# EAGLE board BOOSTDCDC_BATT (1) (EAGLE 9.5.2)
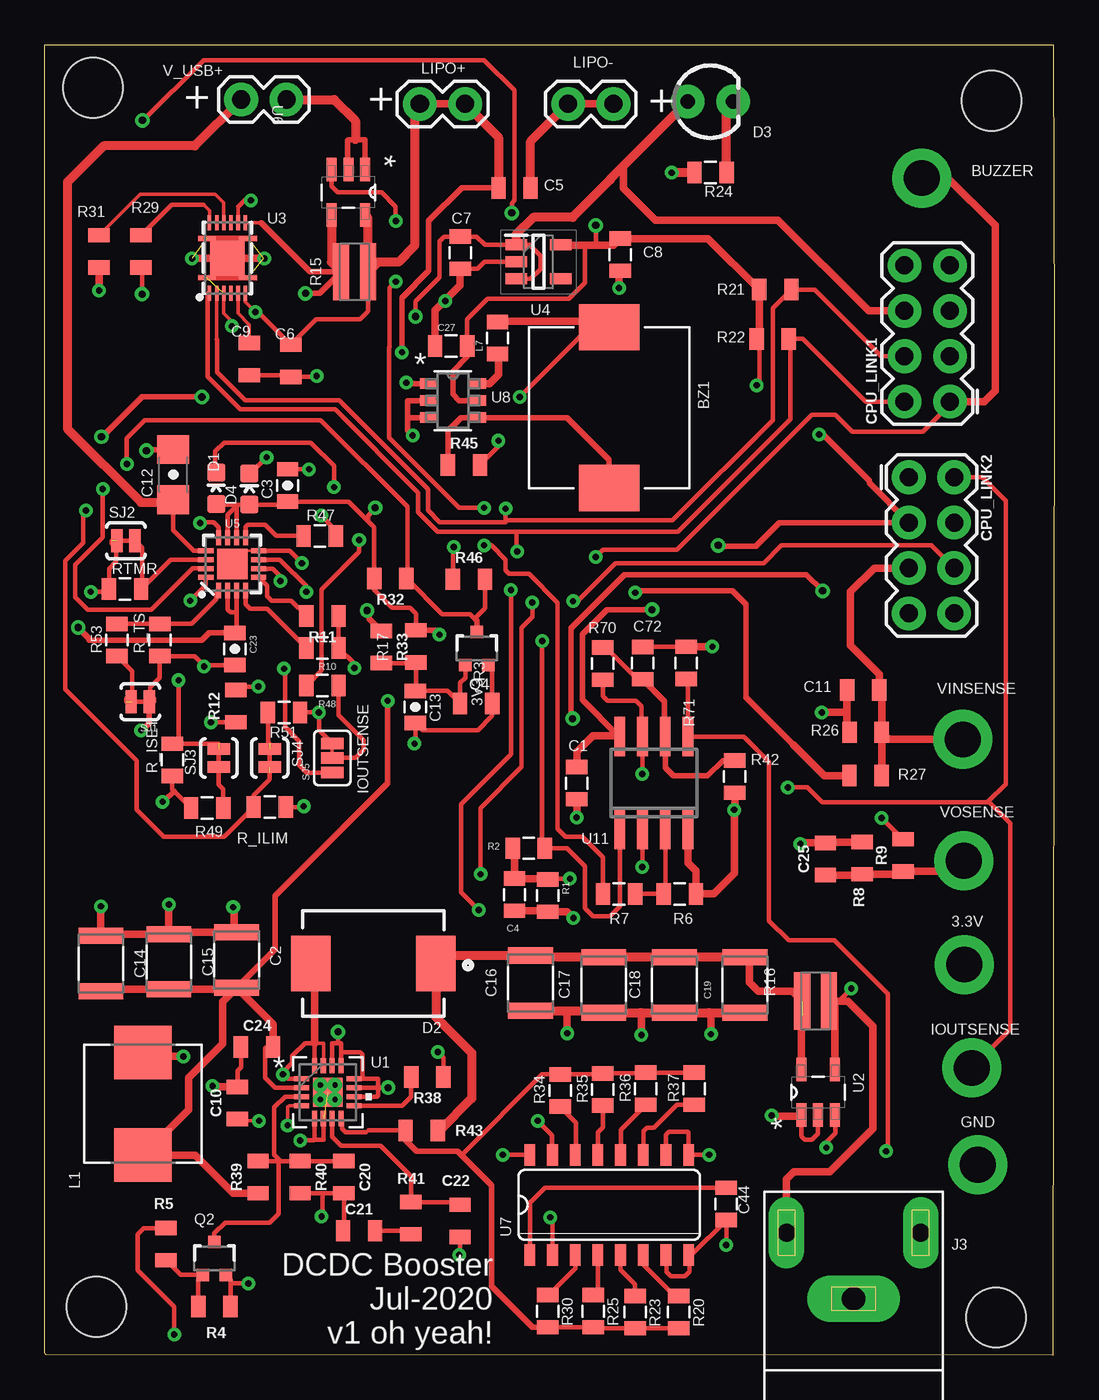
[diagram p0: board, top side]
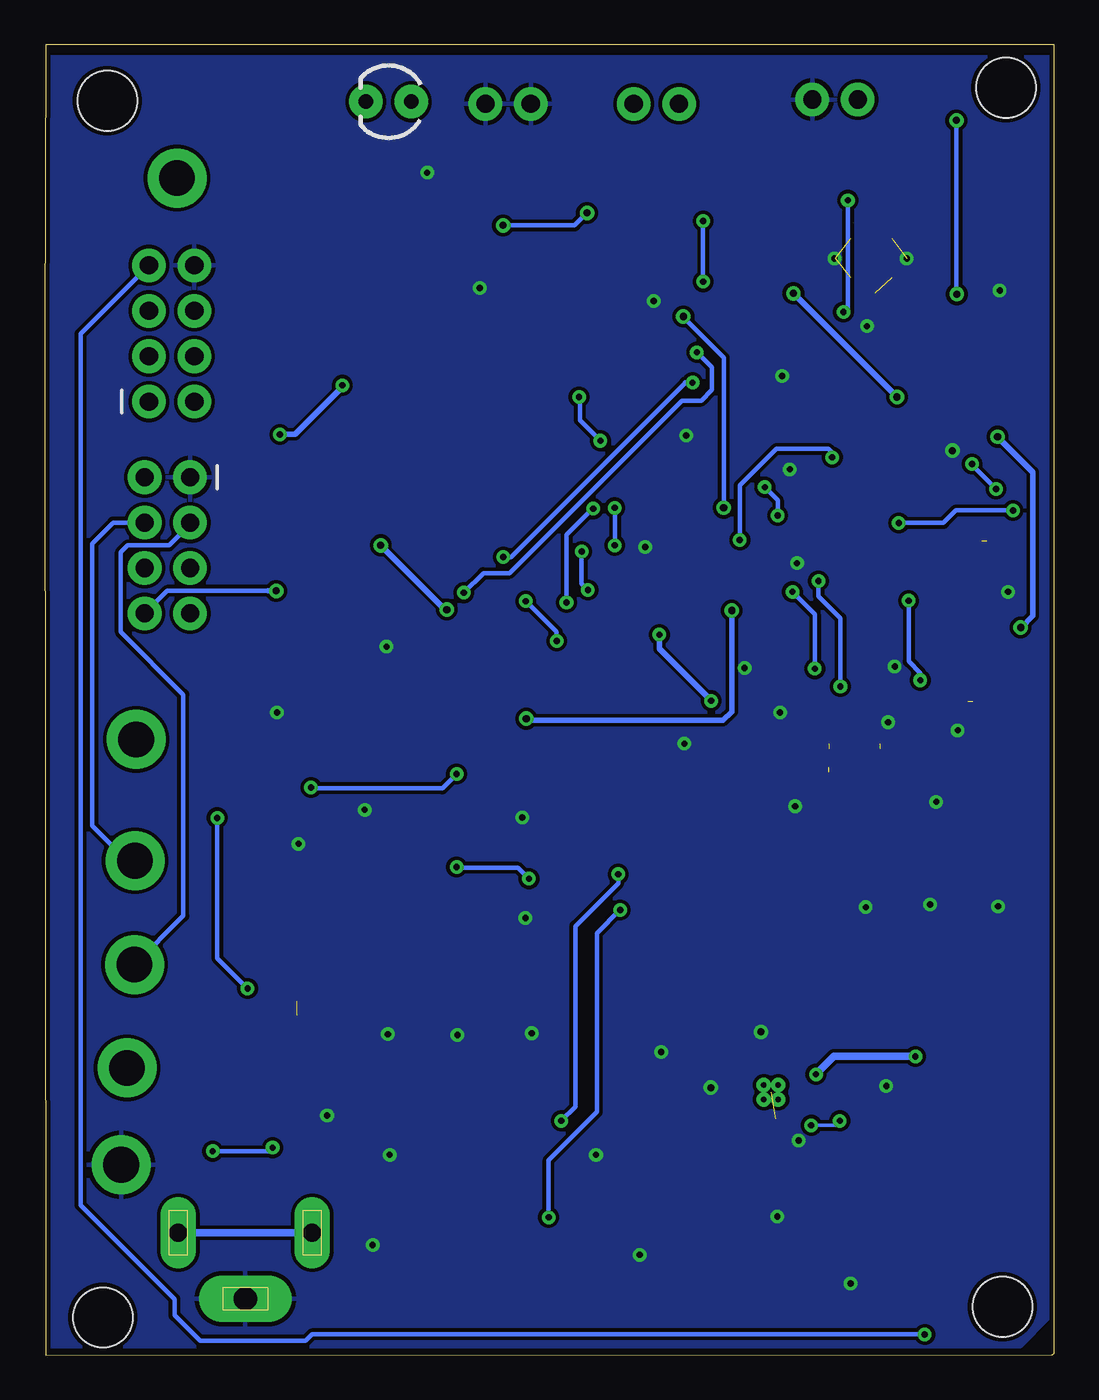
[diagram p1: board, bottom side, seen from below]

Size 56.51 x 73.33 mm. Coordinates in mm from the lower left corner, seen from the top.
Outline: 0,73.32 56.45,73.33 56.51,57.02 56.44,0 0.1,0.02 0,0.12 0,73.32
Copper layers (1*16): Top 0.035mm / dielectric 1.5mm / Bottom 0.035mm
Design rules "default *": minimum track width 6mil, minimum drill 0.3mm, track to track 8mil, track to pad 8mil, pad to pad 8mil, via to via 8mil, smd to smd 8mil, copper to edge 10mil, drill to drill 6mil, minimum pad ring 10mil, minimum via ring 8mil, stop-mask expansion 4mil, vias tented up to drill 0mil, thermal gap 10mil
Net classes: 2 gnd: width 0.305 mm, drill 0.483 mm, clearance 0.203 mm
Holes 3.35 mm at 2.7,70.92 2.9,2.72 53,70.19 53.25,2.12

## Footprints (pad centres in the part's own frame; a part is rotated, then mirrored left to right if it is on the bottom)
1X01_2MM = drill 2 pad 3.302: 1 0,0
PKMCS0909 = smd 2.6 x 3.4: 1 -4.5,0; 2 4.5,0
0805 = smd 0.8 x 1.2: 1 -0.9,0; 2 0.9,0
WCAP-CSGP_1210 = smd 0.9 x 2.5: 1 -1.55,0; 2 1.55,0
0805-CAP = smd 0.8 x 1.2: 1 -0.9,0; 2 0.9,0
0805@1 = smd 0.8 x 1.2: 1 -0.9,0; 2 0.9,0
1206-CAP = smd 1.6 x 1.8: 1 -1.4,0; 2 1.4,0
2X4 = drill 1.016 pad 1.88: 1 -3.81,-1.27; 2 -3.81,1.27; 3 -1.27,-1.27; 4 -1.27,1.27; 5 1.27,-1.27; 6 1.27,1.27; 7 3.81,-1.27; 8 3.81,1.27
LED-0603 = smd 1 x 1: A 0,-0.877; C 0,0.877
DIOM7959X250N = smd 2.2 x 3.1: A 3.5,0; C -3.5,0
LED_3MM = drill 0.813 pad 1.88: A -1.27,0; K 1.27,0
PJRAN1X1U01X = drill 1.3 pad 2.6 long: 1 0,0 | drill 1 pad 2 long: 2 3.75,3.7; 3 -3.75,3.7
INDM7366X500 = smd 3 x 3.2: 1 -2.87,0; 2 2.87,0
1X02 = drill 1.016 pad 1.88: 1 0,0; 2 2.54,0
SOT323 = smd 0.7 x 0.7: 1 -0.65,-0.925; 2 0.65,-0.925; 3 0,0.925
WRIS-KWKH_0612 = smd 3.2 x 0.9: 1 0,0.75; 2 0,-0.75
PAD-JUMPER-2-NC_BY_TRACE_YES_SILK = smd 0.635 x 1.27: 1 -0.508,0; 2 0.508,0
PAD-JUMPER-3-2OF3_NC_BY_TRACE_YES_SILK_FULL_BOX = smd 0.635 x 1.27: 1 -0.813,0; 2 0,0; 3 0.813,0
RTE16_1P66X1P66_TEX = smd 0.85 x 0.28: 1 -1.475,0.75; 2 -1.475,0.25; 3 -1.475,-0.25; 4 -1.475,-0.75; 9 1.475,-0.75; 10 1.475,-0.25; 11 1.475,0.25; 12 1.475,0.75 | smd 0.28 x 0.85: 5 -0.75,-1.475; 6 -0.25,-1.475; 7 0.25,-1.475; 8 0.75,-1.475; 13 0.75,1.475; 14 0.25,1.475; 15 -0.25,1.475; 16 -0.75,1.475 | smd 1.66 x 1.6: 17 0,0 | drill 0.305 pad 0.508: V -0.406,-0.406; V_1 -0.406,0.406; V_2 0.406,-0.406; V_3 0.406,0.406
SOT95P280X145-5N = smd 1.321 x 0.559: 1 -1.27,0.94; 2 -1.27,0; 3 -1.27,-0.94; 4 1.27,-0.94; 5 1.27,0.94
PDSO-N12 = smd 0.2 x 0.85: 1 -1,-1.975; 2 -0.6,-1.975; 3 -0.2,-1.975; 4 0.2,-1.975; 5 0.6,-1.975; 6 1,-1.975; 7 1,1.975; 8 0.6,1.975; 9 0.2,1.975; 10 -0.2,1.975; 11 -0.6,1.975; 12 -1,1.975 | smd 1.95 x 1.95: EP 0,0 | smd 1 x 0.25: EP1 -1.15,1.1; EP2 -1.15,-1.1; EP3 1.15,-1.1; EP4 1.15,1.1
SOT95P282X145-5N = smd 1.2 x 0.6: 1 -1.25,0.95; 2 -1.25,0; 3 -1.25,-0.95; 4 1.25,-0.95; 5 1.25,0.95
PVQFN-N16 = smd 0.28 x 0.85: 1 -0.75,-1.475; 2 -0.25,-1.475; 3 0.25,-1.475; 4 0.75,-1.475; 9 0.75,1.475; 10 0.25,1.475; 11 -0.25,1.475; 12 -0.75,1.475 | smd 0.85 x 0.28: 5 1.475,-0.75; 6 1.475,-0.25; 7 1.475,0.25; 8 1.475,0.75; 13 -1.475,0.75; 14 -1.475,0.25; 15 -1.475,-0.25; 16 -1.475,-0.75 | smd 1.7 x 1.7: EP 0,0
SO16 = smd 0.6 x 1.2: 1 -4.445,-2.8; 2 -3.175,-2.8; 3 -1.905,-2.8; 4 -0.635,-2.8; 5 0.635,-2.8; 6 1.905,-2.8; 7 3.175,-2.8; 8 4.445,-2.8; 9 4.445,2.8; 10 3.175,2.8; 11 1.905,2.8; 12 0.635,2.8; 13 -0.635,2.8; 14 -1.905,2.8; 15 -3.175,2.8; 16 -4.445,2.8
DBV6 = smd 0.972 x 0.568: 1 -1.362,0.95; 2 -1.362,0; 3 -1.362,-0.95; 4 1.362,-0.95; 5 1.362,0; 6 1.362,0.95
SO08 = smd 0.6 x 2.2: 1 -1.905,-2.6; 2 -0.635,-2.6; 3 0.635,-2.6; 4 1.905,-2.6; 5 1.905,2.6; 6 0.635,2.6; 7 -0.635,2.6; 8 -1.905,2.6

## Placement (x,y rotation side)
3V3  M01PTH_2MM  [1X01_2MM]  51.48,21.86 0 top
BUZZER  M01PTH_2MM  [1X01_2MM]  49.1,65.87 0 top
BZ1  PKMCS0909E4000-R1  [PKMCS0909]  31.6,53.02 270 top
C1  100n  [0805]  29.79,32.01 270 top
C2  47uF 16V  [WCAP-CSGP_1210]  10.75,22.12 270 top
C3  10uF  [0805-CAP]  13.6,48.67 90 top
C4  N.C.  [0805]  26.3,25.77 90 top
C5  100n  [0805@1]  26.3,65.32 0 top
C6  1uF / 16V  [0805@1]  13.77,55.64 270 top
C7  4.7uF  [0805]  23.26,61.69 270 top
C8  4.7uF  [0805]  32.21,61.58 270 top
C9  470n  [0805@1]  11.46,55.74 270 top
C10  47n 35V  [0805@1]  10.8,14.12 90 top
C11  100n  [0805@1]  45.81,37.23 180 top
C12  1.0uF  [1206-CAP]  7.2,49.27 90 top
C13  10uF  [0805-CAP]  20.75,36.27 270 top
C14  47uF 16V  [WCAP-CSGP_1210]  3.15,21.92 270 top
C15  47uF 16V  [WCAP-CSGP_1210]  6.95,22.02 270 top
C16  47uF 25V  [WCAP-CSGP_1210]  27.2,20.82 90 top
C17  47uF 25V  [WCAP-CSGP_1210]  31.3,20.72 90 top
C18  47uF 25V  [WCAP-CSGP_1210]  35.25,20.72 90 top
C19  47uF 25V  [WCAP-CSGP_1210]  39.2,20.72 90 top
C20  47n 35V  [0805@1]  16.75,9.97 270 top
C21  100n 50V  [0805@1]  17.6,6.97 0 top
C22  270p 50V  [0805@1]  23.25,7.52 90 top
C23  10uF  [0805-CAP]  10.65,39.52 270 top
C24  100n 50V  [0805@1]  11.89,17.24 0 top
C25  100n  [0805@1]  43.7,27.77 90 top
C27  100n  [0805]  22.75,56.47 0 top
C44  100n  [0805]  38.15,8.47 90 top
C72  N.C.  [0805]  33.47,38.73 270 top
CPU_LINK1  [2X4]  49.4,57.17 90 top
CPU_LINK2  [2X4]  49.64,45.32 270 top
D1  BLUE  [LED-0603]  9.6,48.52 0 top
D2  B520C-13-F  [DIOM7959X250N]  18.4,21.92 180 top
D3  [LED_3MM]  37.26,70.14 0 top
D4  RED  [LED-0603]  11.45,48.47 0 top
GND  M01PTH_2MM  [1X01_2MM]  52.23,10.66 0 top
IOUTSENSE  M01PTH_2MM  [1X01_2MM]  51.9,16.08 0 top
J3  PJRAN1X1U01X  [PJRAN1X1U01X]  45.28,3.16 0 top
L1  2.2uH - 74437346022  [INDM7366X500]  5.5,14.07 90 top
L7  MMZ2012Y202BT000  [0805]  25.35,56.92 90 top
LIPO+  LiPoIN  [1X02]  21,70.02 0 top
LIPO-  LiPoIN  [1X02]  29.3,70.02 0 top
Q2  2N7002PW  [SOT323]  9.5,5.42 0 top
Q4  2N7002PW  [SOT323]  24.19,39.55 0 top
R1  10k  [0805]  28.15,25.72 270 top
R2  10k  [0805]  27.1,28.37 0 top
R3  1M  [0805]  24.15,36.47 180 top
R4  470k  [0805]  9.5,2.72 180 top
R5  33R  [0805]  6.8,6.22 90 top
R6  82k  [0805]  35.55,25.82 0 top
R7  330k  [0805]  32.15,25.82 0 top
R8  39k  [0805]  45.75,27.82 270 top
R9  150k  [0805]  48.05,27.97 90 top
R10  180  [0805]  15.55,39.57 180 top
R11  1M  [0805]  15.55,41.37 180 top
R12  1M  [0805]  10.7,36.32 90 top
R15  0.01R  [WRIS-KWKH_0612]  17.35,60.62 90 top
R16  0.01R  [WRIS-KWKH_0612]  43.15,19.82 270 top
R17  330R  [0805]  20.78,39.67 90 top
R20  11K  [0805]  35.5,2.42 270 top
R21  4k7  [0805]  40.9,59.62 0 top
R22  4k7  [0805]  40.75,56.87 0 top
R23  5K6  [0805]  33.05,2.42 270 top
R24  200R  [0805]  37.27,66.17 0 top
R25  2K8  [0805]  30.7,2.47 270 top
R26  75k  [0805]  45.95,34.86 0 top
R27  39k  [0805]  45.94,32.43 180 top
R29  10k  [0805]  5.4,61.77 270 top
R30  1K4  [0805]  28.15,2.47 270 top
R31  10k  [0805]  3.05,61.77 90 top
R32  470k  [0805]  19.35,43.47 180 top
R33  33R  [0805]  18.84,39.63 270 top
R34  180K  [0805]  28.85,14.82 90 top
R35  91K  [0805]  31.25,14.87 90 top
R36  43K  [0805]  33.65,14.92 90 top
R37  22K  [0805]  36.35,14.92 90 top
R38  78.7k  [0805]  21.42,15.58 180 top
R39  78.7k  [0805]  11.95,9.97 90 top
R40  78.7k  [0805]  14.3,9.97 270 top
R41  1.87k  [0805]  20.5,7.67 270 top
R42  3k3  [0805]  38.63,32.38 90 top
R43  78.7k  [0805]  21.1,12.59 180 top
R45  330R  [0805]  23.47,49.82 0 top
R46  10k  [0805]  23.75,43.42 0 top
R47  180  [0805]  15.4,45.85 0 top
R48  1k  [0805]  15.55,37.47 180 top
R49  590  [0805]  9.1,30.62 0 top
R51  1.1k  [0805]  13.4,35.97 180 top
R53  10k  [0805]  4.05,40.02 90 top
R70  10k  [0805]  31.24,38.7 270 top
R71  100k  [0805]  35.91,38.74 270 top
R_ILIM  [0805]  12.6,30.67 180 top
R_ISET  [0805]  7.15,33.32 90 top
R_TS  [0805]  6.45,40.02 90 top
RTMR  [0805]  4.5,42.87 0 top
SJ1  [PAD-JUMPER-2-NC_BY_TRACE_YES_SILK]  5.35,36.57 180 top
SJ2  [PAD-JUMPER-2-NC_BY_TRACE_YES_SILK]  4.55,45.57 0 top
SJ3  [PAD-JUMPER-2-NC_BY_TRACE_YES_SILK]  9.75,33.42 90 top
SJ4  [PAD-JUMPER-2-NC_BY_TRACE_YES_SILK]  12.6,33.42 270 top
SJ5  [PAD-JUMPER-3-2OF3_NC_BY_TRACE_YES_SILK_FULL_BOX]  16.1,33.42 90 top
U1  TPS55330RTET  [RTE16_1P66X1P66_TEX]  15.85,14.72 0 top
U2  MAX9938TEUK+T (G=25)  [SOT95P280X145-5N]  43.29,14.72 90 top
U3  BQ27441-G1  [PDSO-N12]  10.23,61.39 0 top
U4  AP2205-W5-33Y  [SOT95P282X145-5N]  27.64,61.18 0 top
U5  BQ24075  [PVQFN-N16]  10.5,44.27 0 top
U6  MAX9938TEUK+T (G=25)  [SOT95P280X145-5N]  17,65.07 270 top
U7  TPIC2810D  [SO16]  31.6,8.42 0 top
U8  SN74LVC1G19DBVR  [DBV6]  22.85,53.42 0 top
U11  MCP6L02SN  [SO08]  34.1,32.02 0 top
V_USB+  [1X02]  11,70.26 0 top
VINSENSE  M01PTH_2MM  [1X01_2MM]  51.39,34.46 0 top
VOSENSE  M01PTH_2MM  [1X01_2MM]  51.45,27.67 0 top

## Library data of the parts
3V3 BUZZER CPU_LINK1 CPU_LINK2 GND IOUTSENSE VINSENSE VOSENSE = SparkFun-Connectors
BZ1 = buzzer
C1 R1 R2 R6 R7 SJ1-SJ5 = SparkFun-Passives
C2 C14-C19 = Wurth_Elektronik_Passive_Capacitors_rev19a; WE-NUMBER: 885012109003/47uF
C3 C13 C23 = SparkFun-Capacitors; PROD_ID: CAP-11330
C4 C27 C44 C72 L7 LIPO+ LIPO- R10 R20 R23-R25 R30 R34-R37 R42 R47-R49 R51 R53 R70 R71 R_ILIM R_ISET R_TS RTMR V_USB+ = SparkFun
C5 C6 C9-C11 C20-C22 C24 C25 = SparkFun-Capacitors; PROD_ID: CAP-14259
C7 C8 = BeagleBone_Blue_R3
C12 = SparkFun-Capacitors; PROD_ID: CAP-09822
D1 = SparkFun-LED; PROD_ID: DIO-08575
D2 = B520C-13-F; AVAILABILITY: Unavailable; DESCRIPTION: Diode Schottky 20V 5A Surface Mount SMC; DIGIKEY-PURCHASE-URL: https://snapeda.com/shop?store=DigiKey&id=325969; MF: Diodes Inc.; MP: B520C-13-F; PACKAGE: DO-214 Diodes Inc.; PRICE: None
D3 = SparkFun-LED; PROD_ID: DIO-08794
D4 = SparkFun-LED; PROD_ID: DIO-00819
J3 = Connectors; CREATED_BY: PCBLayout.com; DIGIKEY_PART_NUMBER: PJRAN1X1U01X-ND; MANUFACTURER: Switchcraft Inc.; MPN: PJRAN1X1U01X
L1 = Inductance_2.2uH; DESCRIPTION: 10µH Shielded Molded Inductor 3.2A 69mOhm Max Nonstandard; DIGIKEY-PURCHASE-URL: https://snapeda.com/shop?store=DigiKey&id=586788; MF: Wurth Electronics; MP: 74437349100; PACKAGE: Nonstandard Wurth Electronics
Q2 Q4 = SparkFun-DiscreteSemi; PROD_ID: TRANS-11151
R3-R5 R8 R9 R11 R12 R17 R21 R22 R26 R27 R29 R31-R33 R38-R41 R43 R45 R46 = SparkFun-Resistors
R15 R16 = Wurth_Resistor_WRIS-KWKH; DATASHEET-URL: https://katalog.we-online.de/pbs/datasheet/561070332051.pdf; IR: 3.2A; MOUNT: SMT; PART-NUMBER: 561070332051; PRATED: 1W; TCR: 350ppm/ °C; TECHNICAL-REFERENCE: KH0612R100F101QAATP0000
U1 = TPS55330; BUILT_BY: EMA_UL_Team; MANUFACTURER_PART_NUMBER: TPS55330RTET; SOURCELIBRARY: TI_2015-1-5; VENDOR: Texas Instruments
U2 U6 = MAX9938; DESCRIPTION: Precision Current-Sense Amplifier; MPN: MAX9938FEUK+T; OC_FARNELL: -; OC_NEWARK: 01N6733; PACKAGE: SOT-23-5; SUPPLIER: Maxim
U3 = battery-management-temp; PROD_ID: IC-13220
U4 = AP2205-W5-7; DESCRIPTION: LDO Voltage Regulators LDO CMOS LowCurr; HEIGHT: 1.45mm; MANUFACTURER_NAME: Diodes Inc.; MANUFACTURER_PART_NUMBER: AP2205-W5-7; MOUSER_PART_NUMBER: 621-AP2205-W5-7; MOUSER_PRICE-STOCK: https://www.mouser.com/Search/Refine.aspx?Keyword=621-AP2205-W5-7
U5 = battery-management-temp; PROD_ID: IC-13219
U7 = EDCPSU - Rev2
U8 = SN74LVC1G19DBVR; DATASHEET_URL: http://www.ti.com/lit/gpn/SN74LVC1G19; DESCRIPTION: 1-of-2 Decoder/Demultiplexer; FAMILY_NAME: LL Decoder, Mux/Demux; GENERIC_PART_NUMBER: SN74LVC1G19; INDUSTRY_STD_PKG_TYPE: SOT-23; MANUFACTURER: Texas Instruments; MANUFACTURER_PART_NUMBER: SN74LVC1G19DBVR; PACKAGE_DESIGNATOR: DBV; PIN_COUNT: 6; VENDOR: Texas Instruments
U11 = EDCPSU_Rev4

## Nets
1.8V: C9.1 U3.5
3.3V: 3V3.1 C1.1 C8.1 C27.2 CPU_LINK2.3 R21.1 R22.1 R29.2 U4.5 U8.5 U11.8
!CE!: R10.2 U5.4
!CHG!: R47.1 U5.9
!PGOOD!: SJ5.1 U5.7
#EN_DCDC: CPU_LINK1.7 R5.2
#SHIPPINGMOD: CPU_LINK2.8 R33.1
BATTERY_IN: C5.1 C6.1 LIPO+.1 LIPO+.2 R15.2 R27.2 U3.6 U3.8 U6.5
BUZZER: BUZZER.1 CPU_LINK1.1 U8.1
EN1: R12.2 U5.6
EN2: R11.2 U5.5
GND: C1.2 C2.1 C3.2 C4.1 C5.2 C6.2 C7.2 C8.2 C9.2 C10.2 C11.2 C12.2 C13.2 C14.1 C15.1 C16.1 C17.1 C18.1 C19.1 C20.2 C21.1 C22.1 C23.2 C24.1 C25.2 C27.1 C44.1 C72.1 CPU_LINK1.8 CPU_LINK2.1 GND.1 J3.1 LIPO-.1 LIPO-.2 Q2.2 Q4.2 R1.2 R3.1 R4.1 R6.2 R8.1 R10.1 R11.1 R12.1 R24.1 R26.1 R31.1 R38.1 R40.2 R42.1 R46.1 R49.1 R51.1 R71.1 R_ILIM.1 R_ISET.1 R_TS.1 RTMR.1 SJ1.1 SJ2.1 SJ5.3 U1.5 U1.6 U1.10 U1.11 U1.12 U1.13 U1.14 U1.17 U2.1 U2.2 U3.3 U3.EP U3.EP1 U3.EP2 U3.EP3 U3.EP4 U4.2 U5.8 U5.EP U6.1 U6.2 U7.7 U7.8 U7.9 U7.10 U7.16 U8.2 U8.3 U11.4 V_USB+.2
GPOUT: R29.1 U3.12
IBATTSENSE: CPU_LINK2.6 R2.2 U11.1
ILIM: R_ILIM.2 SJ4.2 U5.12
IOUTSENSE: CPU_LINK2.2 IOUTSENSE.1 R70.2 U11.7
ISET: R_ISET.2 SJ3.2 U5.16
N$1: D4.C R48.2
N$2: CPU_LINK2.7
N$3: CPU_LINK1.3
N$4: Q2.1 R4.2 R5.1
N$5: CPU_LINK1.5
N$6: D1.C R47.2
N$7: R53.1 SJ1.2
N$8: R71.2 U2.3 U11.5
N$9: R51.2 SJ4.1
N$10: C4.2 R1.1 R2.1 U11.2
N$11: R6.1 R7.2 U11.3
N$13: J3.2 J3.3 R9.2 R16.1 U2.4
N$14: R49.2 SJ3.1
N$15: R48.1 SJ5.2
N$16: R20.1 U7.6
N$17: L7.1 U8.6
N$18: D3.K R24.2
N$19: BZ1.1 L7.2 R45.2
N$21: R23.1 U7.5
N$22: BZ1.2 R45.1 U8.4
N$23: C13.1 Q4.1 R3.2 R17.1 R33.2
N$24: R25.1 U7.4
N$30: R30.1 U7.3
N$31: R34.1 U7.14
N$32: R35.1 U7.13
N$33: R36.1 U7.12
N$34: R37.1 U7.11
N$35: C10.1 U1.4
N$36: D2.A L1.2 U1.1 U1.15 U1.16
N$37: R38.2 U1.9
N$42: C20.1 Q2.3 R39.2 R40.1 U1.3
N$43: C21.2 R41.2
N$44: C22.2 R41.1 U1.7
N$45: R20.2 R23.2 R25.2 R30.2 R34.2 R35.2 R36.2 R37.2 R43.2 U1.8
N$46: R7.1 U6.3
N$77: C72.2 R42.2 R70.1 U11.6
SCL: CPU_LINK1.4 R21.2 U3.2 U7.15
SDA: CPU_LINK1.2 R22.2 U3.1 U7.2
SYSOFF: Q4.3 R32.1 R46.2 U5.15
TMR: RTMR.2 SJ2.2 U5.14
TS: R31.2 U3.10
TS1: R53.2 R_TS.2 U5.1
V_USB: C12.1 U5.13 V_USB+.1
VBATT: C23.1 R15.1 U3.7 U5.2 U5.3 U6.4
VCC-ISO: C44.2 U7.1
VINSENSE: C11.1 CPU_LINK2.5 R26.2 R27.1 VINSENSE.1
VOSENSE: C25.1 CPU_LINK2.4 R8.2 R9.1 VOSENSE.1
VSOURCE: C16.2 C17.2 C18.2 C19.2 D2.C R16.2 R43.1 U2.5
VSYS: C2.2 C3.1 C7.1 C14.2 C15.2 C24.2 CPU_LINK1.6 D1.A D3.A D4.A L1.1 R17.2 R32.2 R39.1 U1.2 U4.1 U4.3 U5.10 U5.11

## Tracks (layer width: path | path; a pad name or v marks a point on that pad's centre or on a via)
1.8V
  Top 0.2: U3.5 10.83,58.29 11.45,57.67
  Top 0.203: C9.1 11.45,57.67
3.3V  (via drill 0.35, 0.4)
  Top 0.254: v39.85,54.27 40,54.42 40,57.02 | 46.15,48.92 46.15,48.81 | 43.55,51.52 v43.35,51.52 | C27.2 23.65,57.97 24.8,59.12 29.35,59.12 30.25,60.02 30.25,62.12 | 32.1,34.67 32.15,34.67 | 30.9,62.12 30.85,62.17 v30.85,63.22 | v26.15,63.92 26.15,64.47 26.3,64.62 26.3,70.77 24.6,72.47 8.9,72.47 5.5,69.07 v5.48,69.09 | v5.45,59.37 5.45,60.82 R29.2
  Top 0.305: 46.15,48.81 CPU_LINK2.3 41.12,46.59 39.8,45.27 37.7,45.27 v37.7,45.32 | 46.15,48.92 43.55,51.52 | C27.2 23.65,55.87 22.85,55.07 22.85,53.77 23.2,53.42 U8.5 | v34,41.72 31.48,41.72 30.1,40.34 30.1,36.67 32.1,34.67
  Top 0.406: U4.5 30.25,62.12 30.9,62.12 31.85,62.12 C8.1 37.14,62.48 R21.1 40,57.02 R22.1 | C1.1 29.79,33.76 30.7,34.67 32.15,34.67 U11.8
  Bottom 0.254: 3V3.1 48.75,24.59 48.75,36.97 52.25,40.47 52.25,44.92 51.85,45.32 49.55,45.32 48.37,46.5 CPU_LINK2.3 | 39.8,54.22 v39.85,54.27 | v30.85,63.22 26.85,63.22 v26.15,63.92 | v5.48,69.09 5.48,59.4 v5.45,59.37
  Bottom 0.305: v43.35,51.52 42.5,51.52 39.8,54.22 | v37.7,45.32 34.05,41.67 v34,41.72
!CE!
  Top 0.254: R10.2 12.45,41.77 11.5,41.77 11.25,42.02 U5.4
!CHG!
  Top 0.254: R47.1 12.97,45.85 12.35,46.47 11.35,46.47 11.25,46.37 U5.9
!PGOOD!  (via drill 0.35)
  Top 0.254: SJ5.1 14.66,32.61 14.25,33.02 14.25,34.37 13.45,35.17 13.45,38.37 v13.4,38.42 | v14.65,42.72 14.65,43.02 13.15,44.52 U5.7
  Bottom 0.254: v13.4,38.42 13.4,41.47 v14.65,42.72
#EN_DCDC  (via drill 0.35)
  Top 0.254: R5.2 5.55,7.12 5.2,6.77 5.2,4.77 7.25,2.72 v7.25,1.17
  Bottom 0.254: v7.25,1.17 41.55,1.17 41.9,0.82 47.82,0.82 49.24,2.24 49.24,3.14 54.5,8.4 54.5,57.15 CPU_LINK1.7
#SHIPPINGMOD  (via drill 0.4)
  Top 0.305: R33.1 18.15,41.22 18.15,41.67 v18.05,41.67 | v29.55,35.62 29.45,35.72 29.45,40.67 32.45,43.67 42.65,43.67 v43.55,42.77
  Bottom 0.254: CPU_LINK2.8 49.65,42.77 44,42.77
  Bottom 0.305: v18.05,41.67 18.05,36.02 18.55,35.52 29.45,35.52 v29.55,35.62 | v43.55,42.77 44,42.77
BATTERY_IN  (via drill 0.35)
  Top 0.2: U3.8 10.83,64.25 | v11.8,58.37 11.23,58.94 U3.6
  Top 0.254: v11.55,64.62 11.2,64.62 10.83,64.25 | v11.8,58.37 11.94,58.37 C6.1 15.2,57.97 17.65,57.97 18.1,58.42 R15.2
  Top 0.305: 41.9,34.17 39.25,36.82 39.25,42.02 38.5,42.77 33.15,42.77 v33.05,42.67 | v20,56.12 20,59.17 21.5,60.67 21.5,63.47 23.35,65.32 C5.1
  Top 0.406: R27.2 43.64,32.43 41.9,34.17 | LIPO+.1 LIPO+.2
  Top 0.508: LIPO+.2 23.65,69.91 25.4,68.16 C5.1 | LIPO+.1 20.7,69.72 20.7,62.07 19.8,61.17 18.65,61.17 R15.2 18.1,63.64 U6.5
  Bottom 0.254: v11.55,64.62 11.55,58.62 v11.8,58.37 | v33.05,42.67 31.95,43.77 30.5,43.77 20.85,53.42 19.75,53.42 19.15,54.02 19.15,55.27 v20,56.12
  Bottom 0.305: v33.05,42.67 32.9,42.67
BUZZER  (via drill 0.35)
  Top 0.254: CPU_LINK1.1 50.67,53.19 49.15,51.67 45.2,51.67 44.25,52.62 42.95,52.62 35.39,45.06 31.24,45.06 v30.84,44.66
  Top 0.305: v20.25,54.42 20.3,54.37 U8.1
  Top 0.406: BUZZER.1 50.55,65.87 53.2,63.22 53.2,53.97 52.59,53.36 CPU_LINK1.1
  Bottom 0.254: 20.65,54.42 30.41,44.66 v30.84,44.66
  Bottom 0.305: v20.25,54.42 20.65,54.42
EN1  (via drill 0.35)
  Top 0.254: U5.6 12.75,44.02 13.2,43.57 v13.2,43.32 | v11.97,37.42 10.9,37.42 R12.2
  Bottom 0.254: v13.2,43.32 13.2,42.47 11.97,41.24 v11.97,37.42
EN2
  Top 0.254: U5.5 12.45,43.05 12.45,42.47 12.7,42.22 13.8,42.22 R11.2
GND  (via drill 0.35, 0.4)  (6 unrouted)
  Top 0.152: U5.EP 11.25,45.02 U5.8
  Top 0.2: U3.3 10.03,58.29 10.48,57.84
  Top 0.254: 3.76,45.57 3.76,45.4 4,45.16 4,44.42 3.6,44.02 RTMR.1 3.45,42.72 v2.58,42.72 | v14.4,44.32 13.7,45.02 U5.8 | 6.14,36.57 6.14,36.74 5.9,36.98 5.9,37.37 6.45,37.92 R_TS.1 8.4,39.12 8.95,38.57 | 8.95,38.57 v8.92,38.55 | C23.2 9,38.62 8.95,38.57 | R49.1 7.25,31.57 7.15,31.67 R_ISET.1 | R51.1 15.25,35.97 15.3,35.92 v15.35,35.97 15.35,34.98 SJ5.3 | R_ILIM.1 14.5,30.67 v14.5,30.72 | Q4.2 25.05,38.41 R3.1 25.05,35.77 24.25,34.97 21.15,34.97 C13.2 20.75,34.22 v20.7,34.22 | R46.1 22.85,45.22 v22.9,45.22 | C9.2 13.67,54.84 C6.2 15.07,54.74 15.17,54.84 v15.22,54.8 | v17.34,38.45 17.34,38.68 R10.1 R11.1 | C3.2 v14.8,49.57 | U1.12 17.8,15.47 | 17.8,15.47 18.65,15.47 18.65,14.97 | 18.65,14.97 U1.11 | U1.10 18.6,14.47 18.65,14.52 18.65,14.97 | U1.6 15.6,12.07 | 15.6,12.07 | 15.1,12.07 | 15.1,12.07 15.6,12.07 | 15.6,12.07 | U1.14 16.1,17.47 | 16.1,17.47 | U1.13 16.6,16.97 | 16.6,16.97 16.6,17.47 | 16.6,17.47 | 16.6,17.47 16.38,17.47 | 16.38,17.47 16.1,17.47 | 16.1,17.47 | 16.6,16.97 17.65,16.97 17.8,16.82 17.8,15.47 | R40.2 15.55,9.07 | 15.55,9.07 C20.2 16.75,7.02 C21.1 | C22.1 23.25,5.62 v23.2,5.62 | v15.5,7.77 15.55,7.82 15.55,9.07 | C10.2 10.8,15.92 10.99,16.11 C24.1 | R38.1 22.32,16.65 v22,16.97 | U7.7 34.8,5.6 34.8,4.67 35.05,4.42 35.85,4.42 36.1,4.67 36.1,5.57 U7.8 36.2,5.62 C44.1 v38.15,6.17 | U7.16 v25.65,11.22 | v37.2,11.22 U7.9 36.05,12.47 36,12.52 34.95,12.52 34.78,12.35 U7.10 | Q2.2 10.4,4.25 10.4,3.92 | 10.4,3.92 R4.1 | 28.1,24.87 R1.2 | R12.1 v9.3,35.42 | C7.2 24.22,60.79 24.61,61.18 U4.2 | 10.48,57.84 v10.48,57.58 | C72.1 R71.1 | U2.2 43.29,12.41 42.95,12.07 42.55,12.07 42.35,12.27 U2.1 | U1.5 15.1,12.07 | 15.1,12.07 15.05,12.02 v14.31,12.02 v14.3,12.02
  Top 0.254: 10.4,3.92 10.5,4.02 v11.4,4.02 | 16.38,17.47 16.42,17.51 v16.42,18.1 | 18.65,14.97 v19.21,14.97 19.22,14.96 v19.22,14.98
  Top 0.305: 7.25,31.57 6.7,31.02 6.7,30.97 v6.6,30.97 | SJ1.1 5.86,35.38 5.45,34.97 v5.4,34.97 | U6.1 17.94,67.98 17.9,68.02 17.4,68.02 17,68.02 16.95,67.97 16.95,66.39 U6.2 | U8.2 20.35,53.42 20.3,53.37 20.3,52.52 | 20.3,52.52 20.35,52.47 U8.3 | 20.3,52.52 20.3,51.77 v20.6,51.47 | C12.2 5.7,50.67 v5.7,50.62
  Top 0.406: C10.2 9.45,15.02 v9.4,15.07 | C15.1 7.05,23.67 C2.1 10.6,23.82 10.6,25.02 v10.55,25.07 | C15.1 3.25,23.57 C14.1 v3.15,25.12 | C15.1 v6.95,25.22 | 29.25,19.27 v29.25,18.02 | 33.35,19.17 33.4,19.12 v33.4,17.92 | 37.2,19.17 37.3,19.07 v37.3,17.97 | C11.2 44.91,36.12 | 44.91,36.12 44.91,35 R26.1 | 44.91,36.12 44.76,35.97 v43.5,35.97 | R42.1 38.65,31.46 38.65,30.57 v38.6,30.52 38.6,26.97 37.45,25.82 R6.2 36.45,27.12 36.01,27.57 U11.4 | C4.1 28.1,24.87 | R1.2 29.25,24.82 v29.6,24.47 | C1.2 29.79,30.28 29.88,30.2 v29.77,30.09 | R8.1 43.75,28.72 C25.2 42.35,28.67 v42.3,28.62 | C7.2 23.26,59.88 22.4,59.02 | 22.4,59.02 v22.43,58.99 | C8.2 32.21,60.58 32.15,60.52 v32.15,59.72 | 22.4,59.02 21.85,58.47 C27.1 | R31.1 v3.05,59.57 | U3.EP 8.38,61.39 8.35,61.42 8.3,61.42 v8.25,61.37 | U3.EP 12.23,61.39 12.25,61.37 | U3.EP 12.28,61.39 v12.3,61.37 | R71.1 37.33,39.64 37.35,39.62 v37.38,39.65 | U2.1 42.27,13.37 40.7,13.37 v40.7,13.42 | LIPO-.1 LIPO-.2
  Top 0.508: C16.1 29.25,19.27 31.2,19.27 C17.1 33.35,19.17 C18.1 37.2,19.17 C19.1 | C5.2 27.2,67.92 LIPO-.1 | R24.1 v35.1,66.17 | V_USB+.2 16.21,70.26 17.4,69.07 17.4,68.02
  Bottom 0.254: v14.5,30.72 14.4,30.72
  pour Bottom: 0.3,72.72 0.3,2.12 1.9,0.52 57.2,0.52 57.2,72.62 0.4,72.62
GPOUT
  Top 0.2: U3.12 9.23,64.04 8.9,64.37
  Top 0.254: R29.1 7.1,64.37 8.9,64.37
IBATTSENSE  (via drill 0.35)
  Top 0.254: U11.1 32.2,25.12 31.65,24.57 30.7,24.57 30.25,25.02 30.25,27.37 29.25,28.37 R2.2 28,28.72 27.85,28.87 v27.85,39.97 | CPU_LINK2.6 49.64,45.32 41.25,45.32 40.25,44.32 31.95,44.32 29.82,42.2 v29.57,42.2
  Bottom 0.254: v29.57,42.2 27.85,40.47 v27.85,39.97
ILIM  (via drill 0.35)  (1 unrouted)
  Top 0.254: U5.12 9.75,46.32 9.45,46.62 8.7,46.62 v8.7,46.57 | v2.31,47.27 2.15,47.11 2.15,45.47 1.14,44.46 1.14,37.28 5.15,33.27 5.15,30.52 6.65,29.02 10.05,29.02 R_ILIM.2 11.7,31.33 12.6,32.23 12.6,32.63
  Bottom 0.254: v8.7,46.57 6.2,46.57 5.5,47.27 v2.31,47.27 v2.3,47.27
IOUTSENSE  (via drill 0.35)
  Top 0.254: U11.7 33.4,34.69 33.4,36.32 33.1,36.62 31.5,36.62 31.24,36.88 R70.2 | U11.7 33.5,34.59 | U11.7 33.47,32.54 v33.45,32.52 | v41.6,31.77 42.7,31.77 43.53,30.94 52.88,30.94 | 52.88,30.94 52.83,30.99 53.8,31.96 53.8,47.82 52.49,49.13 CPU_LINK2.2 | 52.88,30.94 54.05,29.77 54.05,18.23 IOUTSENSE.1
  Bottom 0.254: v33.45,32.52 34.25,31.72 41.55,31.72 v41.6,31.77
ISET  (via drill 0.35)  (1 unrouted)
  Top 0.254: 9.75,34.21 9.47,34.21 9.46,34.22 R_ISET.2 7.5,34.57 v7.5,37.77 | U5.16 9.02,43.09 v8.15,42.22
  Bottom 0.254: v8.15,42.22 8.15,38.82 7.5,38.17 v7.5,37.77
N$1  (via drill 0.35)
  Top 0.254: R48.2 15.5,38.32 15.5,42.87 17.6,44.97 v17.6,45.62 | v12.42,50.24 11.53,49.35 D4.C
  Bottom 0.254: v17.6,45.62 17.6,48.67 15.55,50.72 12.65,50.72 12.3,50.37 v12.42,50.24
N$4
  Top 0.254: R5.1 7.62,4.5 Q2.1 8.6,4.25 R4.2
N$6  (via drill 0.35)
  Top 0.254: R47.2 16.21,45.94 16.21,46.26 v15.48,46.99 | v16.2,48.57 16.2,49.77 14.9,51.07 10.05,51.07 9.55,50.57 9.55,49.45 D1.C
  Bottom 0.254: v16.2,48.57 15.48,47.85 v15.48,46.99
N$7  (1 unrouted)
  Top 0.254: R53.1 4.9,38.27 4.9,37.08 4.8,36.98 | 4.56,36.57 4.56,36.74 4.8,36.98 | 4.8,36.98 5,36.98
N$8  (via drill 0.35)
  Top 0.254: R71.2 36.01,37.74 U11.5 38.6,34.62 38.85,34.62 39.15,34.62 40.55,33.22 40.55,24.32 41.65,23.22 44.2,23.22 47.2,20.22 47.2,11.42 v47.1,11.42 | v43.75,11.62 43.75,11.92 44.25,12.42 44.25,13.43 U2.3
  Bottom 0.254: v47.1,11.42 43.95,11.42 v43.75,11.62
N$9  (1 unrouted)
  Top 0.254: R51.2 12.5,34.31 12.6,34.21
N$10  (via drill 0.35)
  Top 0.254: C4.2 26.35,26.72 26.45,26.62 | R1.1 28.2,26.67 v29.4,26.67 | v33.45,27.32 33.45,29.41 U11.2
  Top 0.406: R1.1 28.1,26.67 C4.2 26.3,28.27 R2.1
  Bottom 0.254: v29.4,26.67 30,27.27 33.45,27.27 v33.45,27.32
N$11
  Top 0.254: U11.3 34.73,25.91 R6.1 R7.2
N$13  (via drill 0.35)
  Top 0.254: R9.2 46.95,29.97 46.95,30.02 46.9,30.07 v46.85,30.07 | v45.15,20.52 44.45,19.82 44.25,19.82
  Top 0.406: J3.3 41.53,9.85 41.95,10.27 43.95,10.27 46.35,12.67 46.35,18.42 44.95,19.82 44.25,19.82 R16.1 44.23,19.49 U2.4
  Bottom 0.254: v46.85,30.07 46.85,22.22 v45.15,20.52
  Bottom 0.406: J3.3 J3.2
N$14
  Top 0.254: SJ3.1 9.75,31.92 10,31.67 R49.2
N$15
  Top 0.254: R48.1 16.45,35.82 17.85,34.42 17.85,33.87 17.4,33.42 SJ5.2
N$16
  Top 0.254: U7.6 33.51,5.07 35.25,3.32 R20.1
N$17
  Top 0.406: L7.1 25.4,55.97 25.4,54.87 24.9,54.37 U8.6
N$18
  Top 0.508: R24.2 38.17,69.78 D3.K
N$19  (via drill 0.35)
  Top 0.254: R45.2 25.4,50.85 v25.4,51.17 | v26.6,53.62 31,58.02
  Top 0.406: L7.2 25.4,57.87 31.15,57.87 | BZ1.1 31.5,57.52 31.15,57.87 | 31,58.02 31.15,57.87
  Bottom 0.254: v25.4,51.17 26.55,52.32 26.55,53.57 v26.6,53.62
N$21
  Top 0.254: R23.1 33.05,3.97 32.23,4.79 U7.5
N$22
  Top 0.305: BZ1.2 31.6,50.12 29.25,52.47 U8.4 23.3,52.47 22.57,51.74 R45.1
N$23
  Top 0.254: Q4.1 23.55,37.92 23.25,37.62 R3.2 22.55,37.17 20.85,37.17 20.8,37.22 20.78,37.2 | 20.78,37.2 R17.1 20.74,38.73 R33.2 | 20.78,37.2 C13.1
  Top 0.305: Q4.1
N$24
  Top 0.254: R25.1 30.96,3.63 U7.4
N$30
  Top 0.254: R30.1 28.2,3.37 29.7,4.87 U7.3
N$31
  Top 0.254: U7.14 29.75,11.28 29.75,13.02 R34.1
N$32
  Top 0.254: R35.1 31.25,12.77 30.96,12.48 U7.13
N$33
  Top 0.254: R36.1 32.25,12.62 32.25,11.23 U7.12
N$34
  Top 0.254: R37.1 35.4,14.02 34.1,12.72 33.7,12.72 33.51,12.53 U7.11
N$35  (via drill 0.35)
  Top 0.203: U1.4 13.67,13.97 13.6,13.89 v13.6,12.87 | v12,13.12 10.9,13.12 C10.1
  Bottom 0.203: v13.6,12.87 12.25,12.87 v12,13.12
N$36  (via drill 0.35)
  Top 0.203: U1.15 15.6,17.47 | 15.6,17.47 | 15.6,17.47 15.1,17.47
  Top 0.254: U1.16 15.1,17.47 14.57,17.47 13.86,16.76 13.86,16.36 13.34,15.84 v13.34,15.72 v13.35,15.72 13.6,15.47 U1.1 | 15.1,21.12 15.2,21.22 15.2,21.62 D2.A
  Top 0.406: 15.1,17.47 15.1,21.12 | v7.77,16.72 5.72,16.72 L1.2
  Bottom 0.406: v13.34,15.72 12.34,16.72 v7.77,16.72
N$37
  Top 0.254: U1.9 20.01,13.97 20.52,14.48 R38.2
N$42
  Top 0.254: C20.1 R40.1 14.27,10.89 14.25,10.87 13.2,10.87 | 13.2,10.87 12.85,11.22 12.85,13.87 13.45,14.47 U1.3 | R39.2 13.2,10.87 | Q2.3 9.5,6.82 10.1,7.42 12.6,7.42 13.1,7.92 13.1,10.77 13.2,10.87
N$43
  Top 0.254: C21.2 20.3,6.97 R41.2
N$44
  Top 0.254: U1.7 16.1,12.22 16.6,11.72 18.8,11.72 20.5,10.02 R41.1 23.1,8.57 C22.2
N$45
  Top 0.254: R43.2 18.12,12.59 18,12.47 16.85,12.47 16.65,12.67 16.65,13.2 U1.8 | R37.2 R36.2 33.6,15.77 R35.2 31.2,15.72 R34.2 27.85,15.72 23.32,11.2 | R20.2 R23.2 30.75,1.52 R25.2 R30.2
  Top 0.305: R30.2 27.3,1.57 25,3.87 25,9.52 23.32,11.2 23.1,11.42 20.82,11.42 20.2,12.04 R43.2
N$46  (via drill 0.35)
  Top 0.254: U6.3 16.06,65.41 16.4,65.07 18.85,65.07 19.65,64.27 v19.65,63.47 | v24.6,47.42 23.2,47.42 19.29,51.33 19.29,56.41 19.3,56.42 19.3,59.72 v19.65,60.07 | R7.1 31.25,27.87 30.1,29.02 29.15,29.02 28.7,29.47 28.7,42.12 27.1,43.72 26,43.72 25.8,43.92 25.8,44.52 25,45.32 v24.6,45.32
  Bottom 0.254: v24.6,47.42 v24.6,45.32 | v19.65,63.47 v19.65,60.07
N$77
  Top 0.254: C72.2 33.19,37.83 31.42,39.6 R70.1
  Top 0.305: C72.2 34.7,36.6 34.7,34.66 U11.6 34.73,32.88 35.2,32.42 37.1,32.42 37.96,33.28 R42.2
SCL  (via drill 0.35)
  Top 0.2: U3.2 9.63,56.84
  Top 0.254: CPU_LINK1.4 46.82,55.9 43.1,59.62 R21.2 40.75,58.57 40.75,52.32 35.15,46.72 25.8,46.72 | 9.63,56.84 9.65,56.82 9.65,54.99 11.22,53.43 16.49,53.43 21.45,48.47 21.45,47.27 22.1,46.62 25.8,46.62 25.8,46.72 | 25.8,46.72 v25.8,47.37 | v27.3,42.12 27.3,41.32 26.7,40.72 26.7,32.92 24.4,30.62 v24.4,26.92 | U7.15 28.4,11.25 28.4,12.32 v27.6,13.12
  Bottom 0.254: v25.8,47.37 25.85,47.37 27.3,45.92 v27.3,42.12 | v27.6,13.12 26.8,13.92 26.8,24.02 24.4,26.42 v24.4,26.92
SDA  (via drill 0.35)
  Top 0.152: U3.1 9.19,59.41
  Top 0.254: CPU_LINK1.2 45.96,53.36 42.45,56.87 41.75,56.87 | 41.75,56.87 R22.2 | 9.19,59.41 9.13,59.35 9.13,54.74 10.95,52.92 16.25,52.92 20.9,48.27 20.9,47.17 22,46.07 26.4,46.07 | 41.75,56.87 41.75,52.37 35.45,46.07 26.4,46.07 | 26.4,46.07 26.4,44.92 v26.45,44.97 | v26.1,42.82 26.1,33.62 23.3,30.82 23.3,25.92 v24.3,24.92 | U7.2 28.43,7.7 28.4,7.72 v28.3,7.72
  Bottom 0.254: v26.45,44.97 26.45,43.17 v26.1,42.82 | v28.3,7.72 28.3,10.92 25.6,13.62 25.6,23.62 v24.3,24.92
SYSOFF  (via drill 0.35)
  Top 0.254: R32.1 20.3,43.42 | 20.3,43.42 22.25,41.47 23.81,41.47 24.07,41.21 | 24.07,41.21 24.15,41.13 | R46.2 24.65,41.79 24.07,41.21 | U5.15 9.01,44.04 8.28,44.04 5.96,41.72 2.4,41.72 1.7,42.42 1.7,44.22 3.25,45.77 v3.25,48.47 | 20.3,43.42 20.3,47.47 15.45,52.32 5.6,52.32 4.6,51.32 v4.6,49.87
  Top 0.305: 24.15,41.13 24.19,41.09 Q4.3
  Bottom 0.254: v3.25,48.47 4.5,49.72 4.5,49.77 v4.6,49.87
TMR
  Top 0.254: SJ2.2 5.45,45.18 5.45,42.92 RTMR.2 7.05,44.52 U5.14
TS
  Top 0.2: 10.03,64.49 U3.10
  Top 0.203: R31.2 5.35,64.97 9.55,64.97 10.03,64.49
TS1
  Top 0.254: U5.1 9.59,42.64 9.59,42.29 8.22,40.92 R_TS.2 R53.2
V_USB
  Top 0.254: U5.13 8.35,45.02 7.2,46.17 7.2,47.72 C12.1
  Top 0.508: V_USB+.1 8.41,67.67 3.3,67.67 1.27,65.64 1.27,51.85 5.4,47.72 7.2,47.72
VBATT  (via drill 0.4)  (1 unrouted)
  Top 0.2: 12.1,63.37 U3.7
  Top 0.254: U5.3 10.75,41.57 | 10.75,41.57 10.75,40.52 C23.1 | U5.2 10.25,41.72 10.4,41.57 10.75,41.57
  Top 0.305: 12.1,63.37 14.85,60.62 R15.1 15.4,59.42 v14.6,59.42 | C23.1 9.2,40.42 8.8,40.02 2.5,40.02 2.5,40.1 v1.88,40.72 | v8.8,53.62 5.45,53.62 3.2,51.37 v3.18,51.4
  Top 0.508: R15.1 16.05,61.17 U6.4
  Bottom 0.305: v14.6,59.42 v8.8,53.62 | v3.18,51.4 1.2,49.42 1.2,41.37 1.85,40.72 v1.88,40.72
VCC-ISO
  Top 0.254: C44.2 28,9.37 27.15,8.53 U7.1
VINSENSE
  Top 0.406: VINSENSE.1 47.25,34.46 R26.2 | R26.2 46.85,37.09 C11.1 46.71,38.11 45.1,39.72 45.1,42.72 46.43,44.05 CPU_LINK2.5 | R26.2 R27.1
VOSENSE
  Top 0.406: C25.1 45.7,26.87 R8.2 47.9,26.92 R9.1 50.67,27.07 51.6,27.57 51.5,27.67 VOSENSE.1
  Bottom 0.254: CPU_LINK2.4 52.68,46.59 53.85,45.42 53.85,29.62 51.9,27.67 VOSENSE.1
VSOURCE  (1 unrouted)
  Top 0.406: U2.5 42.35,18.97 42.4,19.02 | C19.2 39.45,22.02 39.45,20.87 39.95,20.37 41.85,20.37 R16.2
  Top 0.508: C19.2 C18.2 | C18.2 34.6,22.27 34.4,22.47 35.05,22.47 C18.2 | C18.2 C17.2 27.3,22.27 C16.2 22.35,22.37 D2.C 21.9,18.92 23.9,16.92 23.9,14.37 22.12,12.59 R43.1
VSYS  (via drill 0.35, 0.4)
  Top 0.254: 10.8,47.59 D4.A 13.42,47.59 C3.1 17,47.77 18.1,46.67 | 10.8,47.59 9.65,47.59 D1.A | U5.10 10.75,47.52 | 10.75,47.52 10.75,47.54 10.8,47.59 | U5.11 10.25,47.02 10.75,47.52 | 18.1,46.67 18.45,46.32 R32.2 18.45,42.82 19.45,41.82 20.45,41.82 20.78,41.49 R17.2 | C24.2 12.41,17.24 12.34,17.17 12.34,15.53 12.9,14.97 U1.2 | U4.1 25,62.13 | U4.1 24.64,62.13 24.18,62.59 C7.1 23.24,62.57 22.35,62.57 22.1,62.32 22.1,60.32 20.76,58.98 v20.76,58.12 | U4.3 27.19,60.23 27.2,60.22 27.75,60.77 27.75,61.52 27.14,62.13 U4.1 | 18.1,46.67 18.1,46.97 18.5,47.37 v18.5,47.42
  Top 0.305: R17.2 21.85,40.57 v22.1,40.32 | v19.2,36.62 19.2,32.02 12.9,25.72 12.9,22.72 C2.2
  Top 0.406: R39.1 10.55,9.07 8.42,11.2 L1.1 8.05,13.75 8.05,15.52 9.95,17.42 9.95,19.77 C2.2 | C24.2 12.79,18.53 C2.2 | C2.2 10.65,20.47 C15.2 3.25,20.47 C14.2 | CPU_LINK1.6 46.13,58.44 41.05,63.52 34.2,63.52 32.41,65.31 32.41,66.56
  Top 0.508: D3.A 32.41,66.56 31.65,65.8 31.65,65.77 29.55,63.67 27.35,63.67 26.39,62.71 U4.1
  Bottom 0.254: v18.5,47.42 18.5,55.82 20.76,58.08 v20.76,58.12
  Bottom 0.305: v22.1,40.32 22.1,39.52 v19.2,36.62

## Text on the board
tPlace: + | + | + | 3.3V | IOUTSENSE | DCDC Booster / Jul-2020 / v1 oh yeah!